# Altium PCB micro_USB.PcbDoc
Units mm, origin at the board's own origin, x right, y up, seen from the top; angles counter-clockwise.
Board outline 89 x 123.55 mm, 4 copper layers (Top Layer, Internal Plane 1, Internal Plane 2, Bottom Layer); 79 components, 73 nets, 290 pads, 14 vias.
Unrouted connection lines stored in the file: 2.
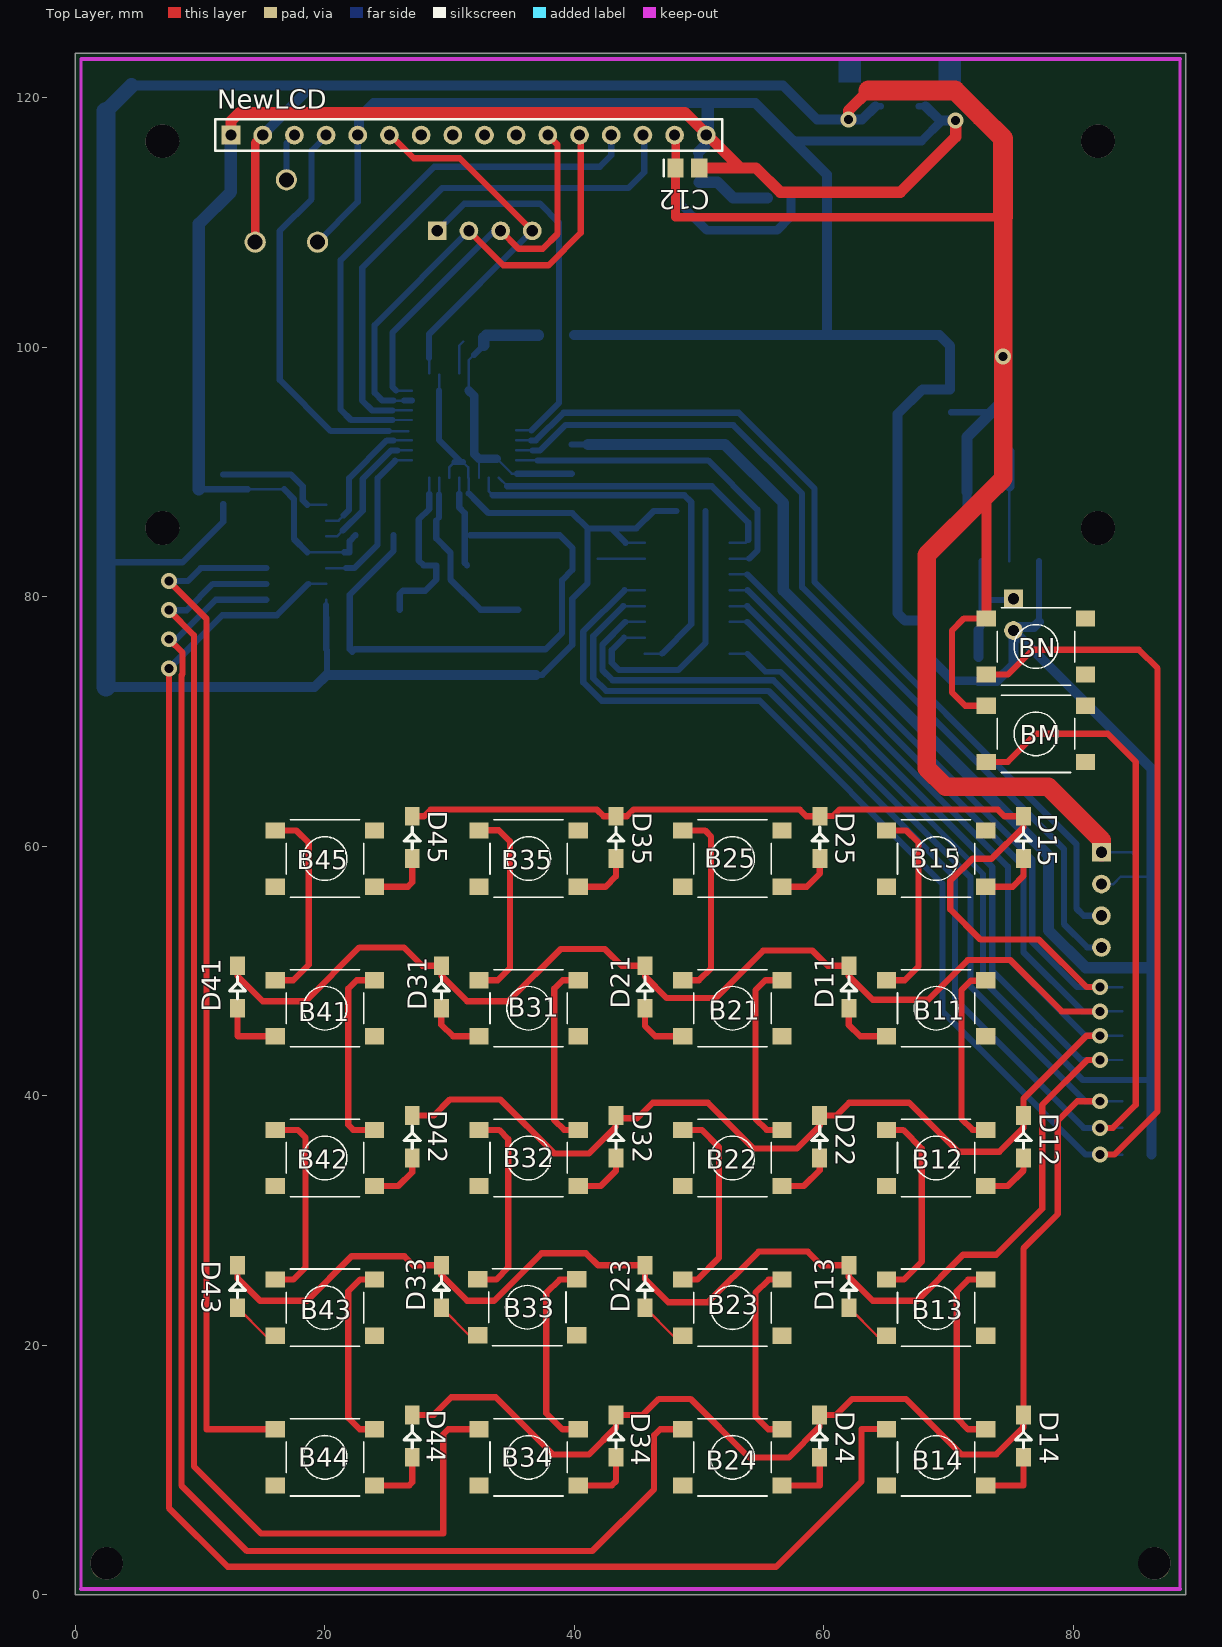
[diagram p0: Top Layer view]
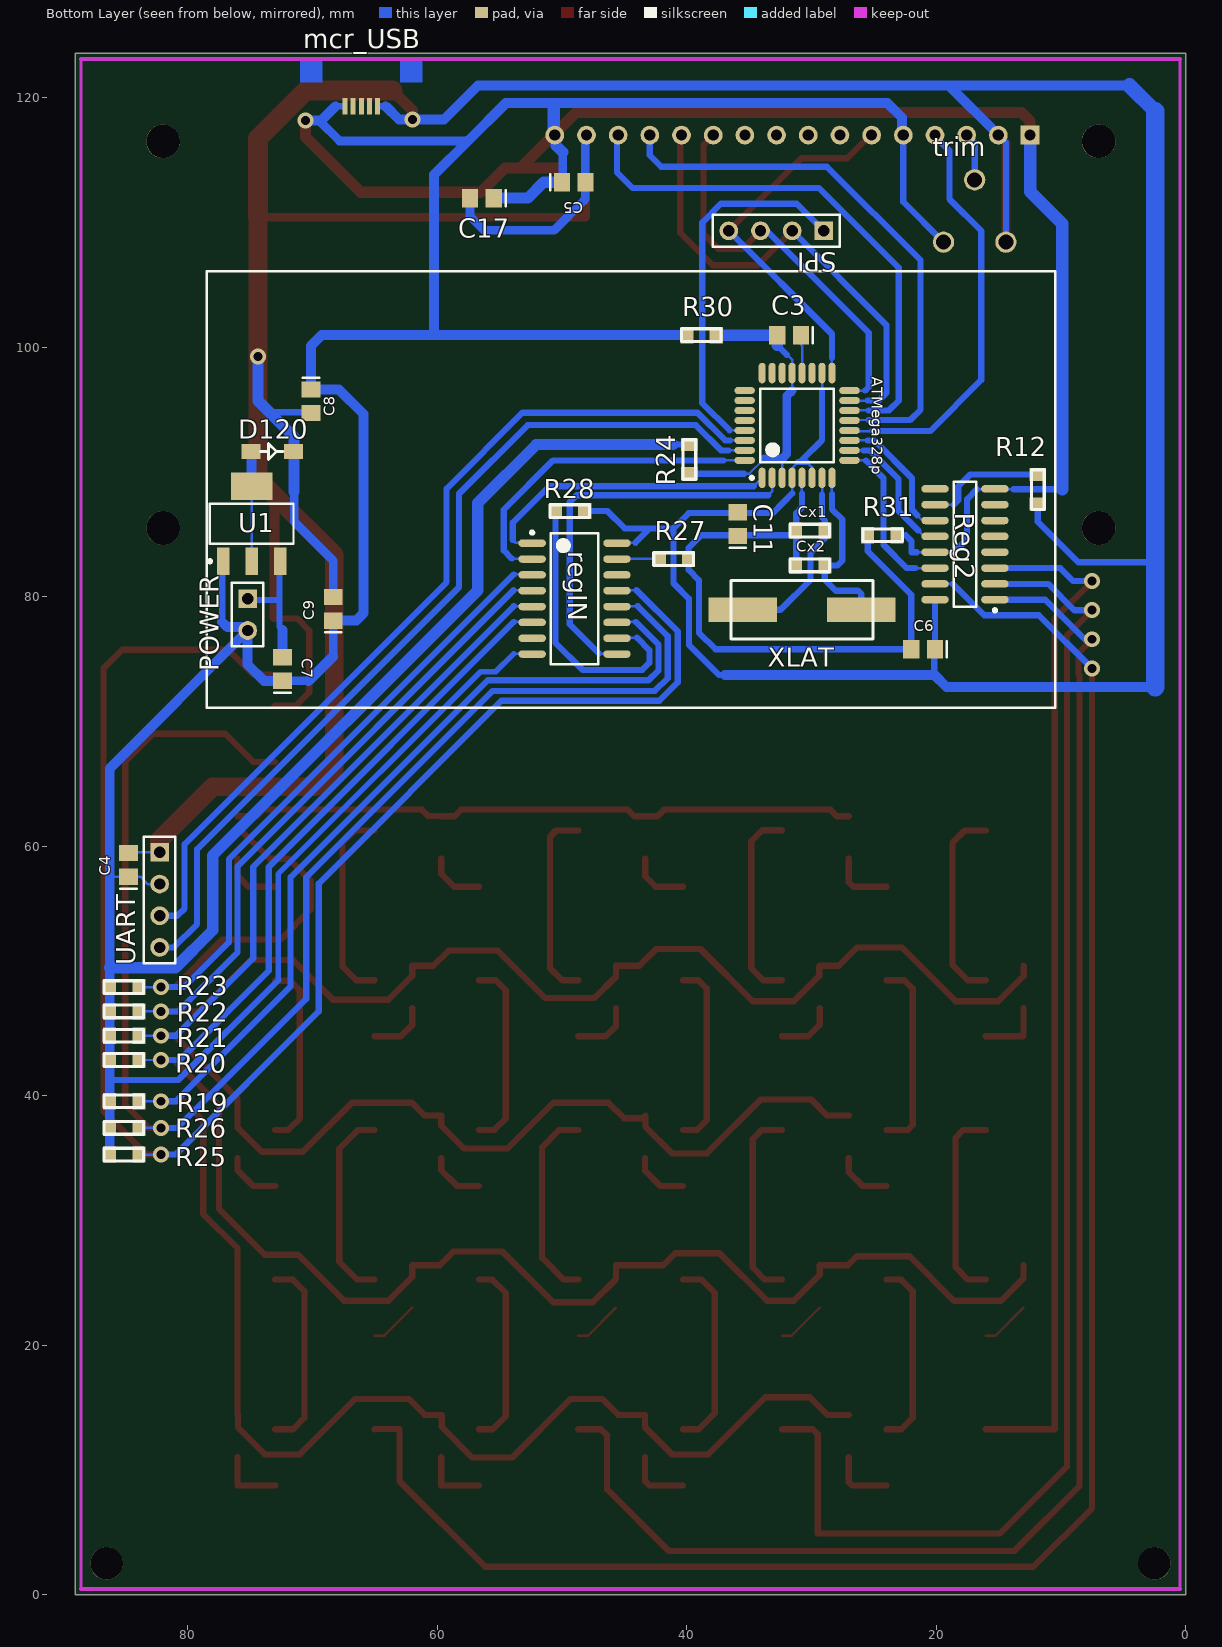
[diagram p1: Bottom Layer view, seen from below]
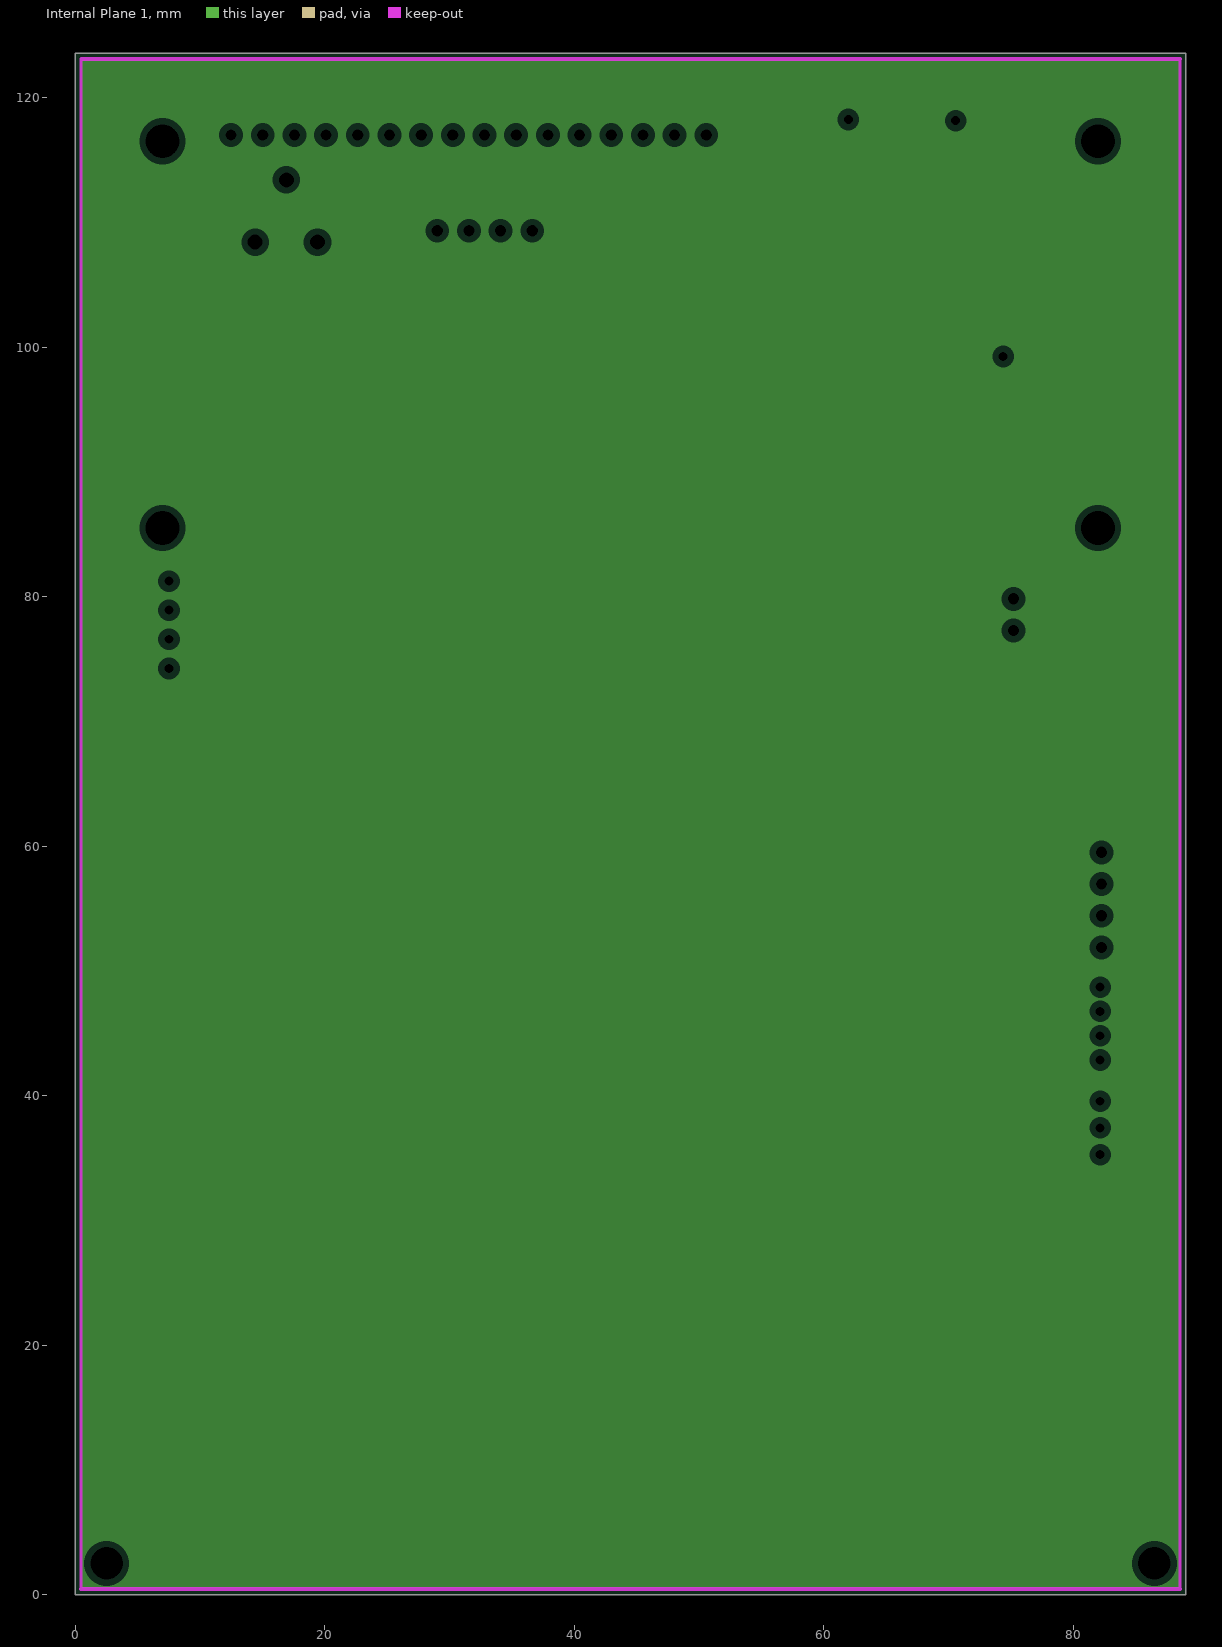
[diagram p2: Internal Plane 1, clearances drawn from the general rule]
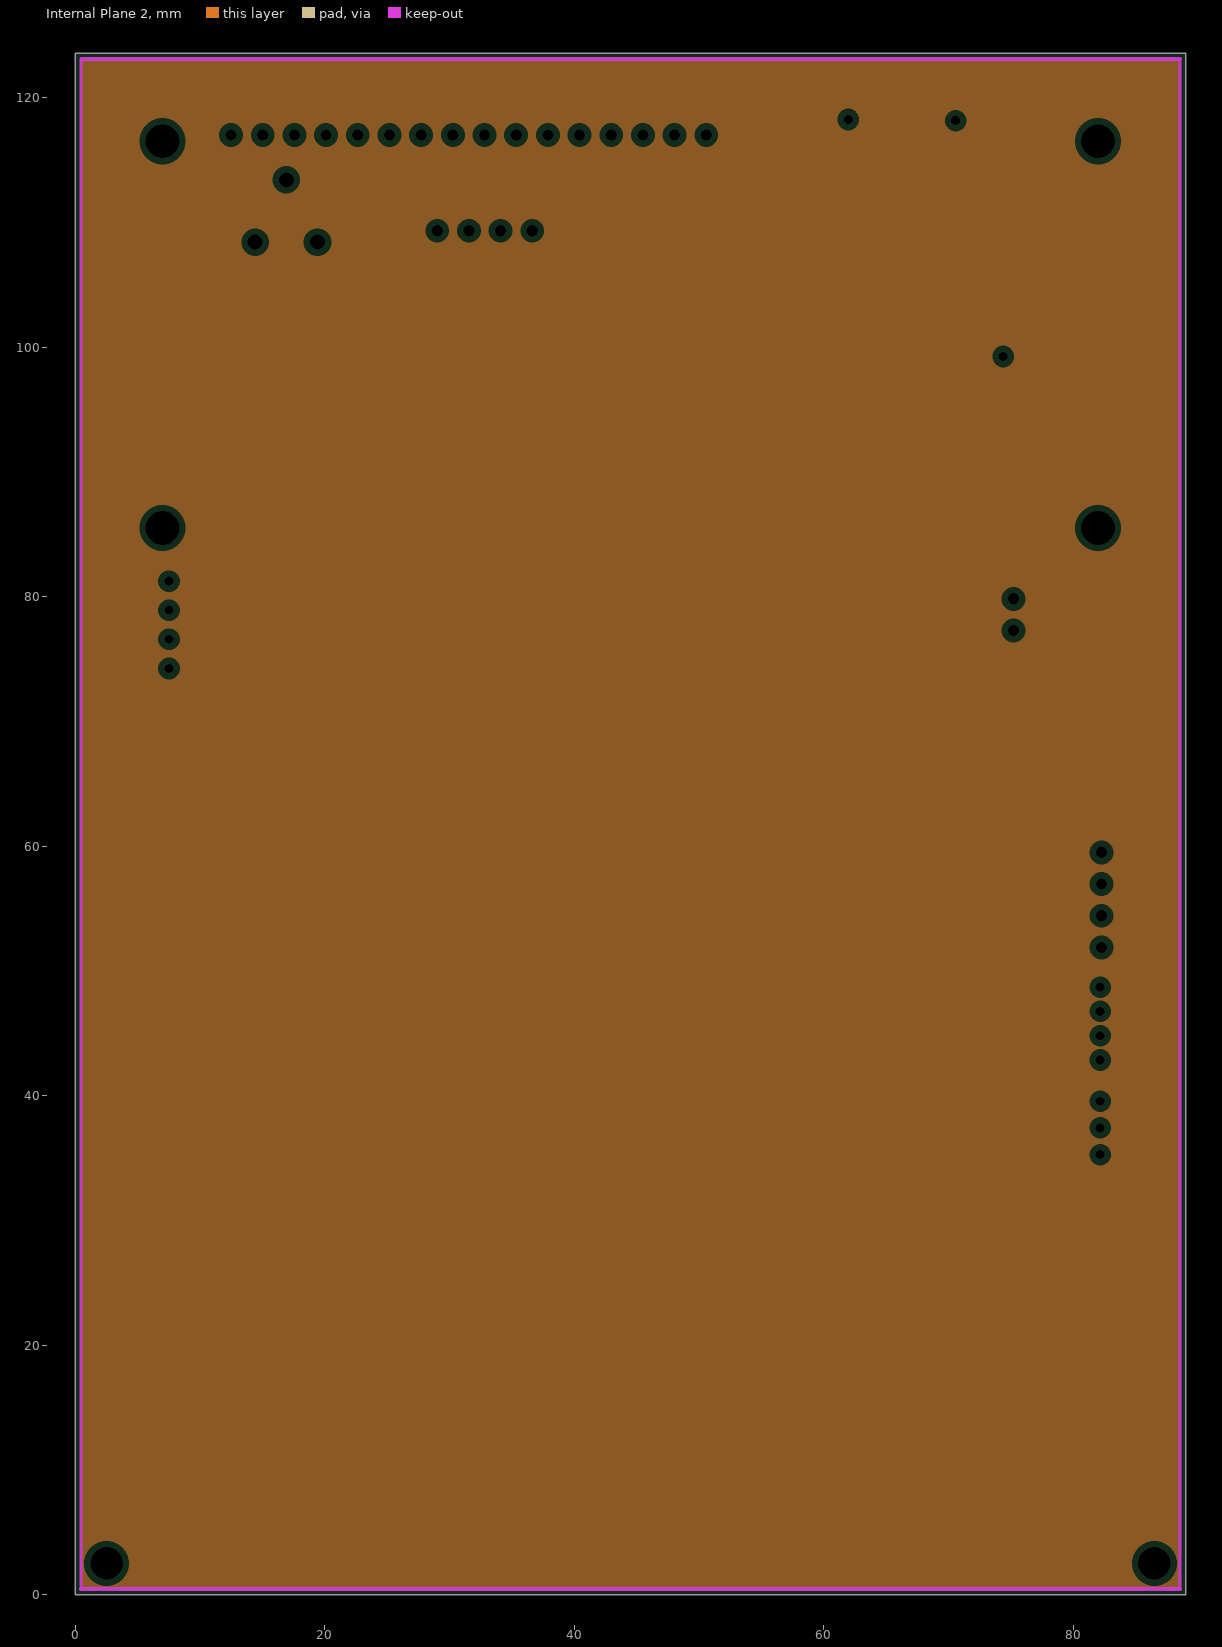
[diagram p3: Internal Plane 2, clearances drawn from the general rule]
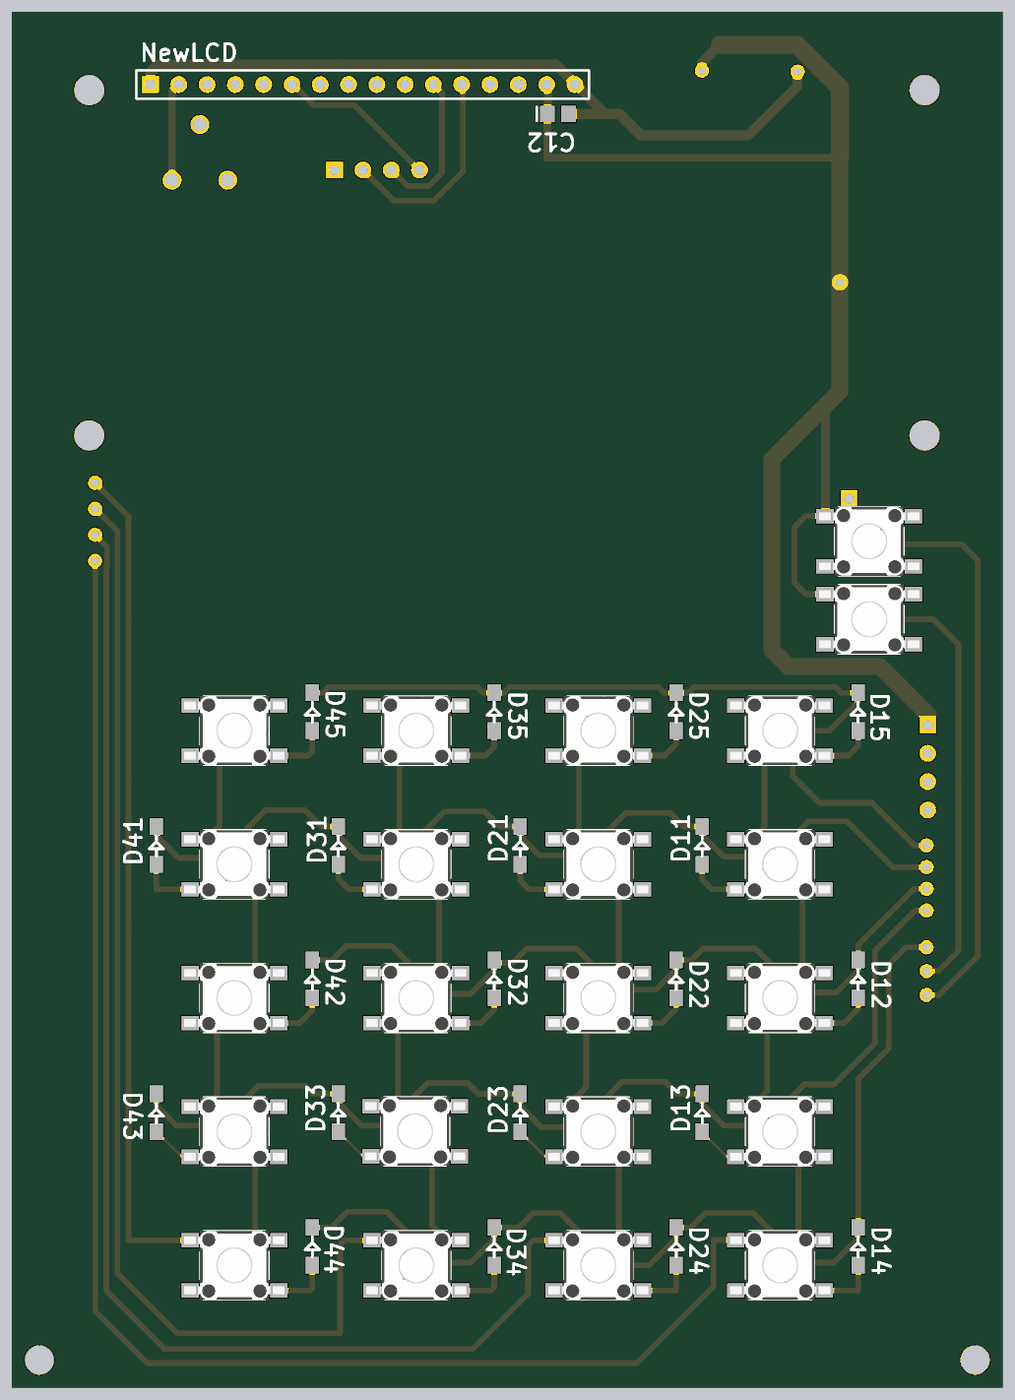
[diagram p4: 3D render of the assembled board from above, using the file's embedded part models]

## Layer stack, top to bottom
Top Solder: solder mask 0.0102, Solder Resist, Dk 3.5
Top Layer: signal copper 0.0356
Dielectric1: dielectric 0.32, FR-4, Dk 4.8
Internal Plane 1: plane copper 0.0356
Dielectric2: dielectric 0.32, FR-4, Dk 4.8
Internal Plane 2: plane copper 0.0356
Dielectric3: dielectric 0.32, FR-4, Dk 4.8
Bottom Layer: signal copper 0.0356
Bottom Solder: solder mask 0.0102, Solder Resist, Dk 3.5

## Board outline
-0.001,0.001 -0.001,123.546 23.27,123.546 46.962,123.546 88.999,123.546 88.999,0.001

## Design rules (kind name [scope] priority, off if disabled: settings)
Clearance [All] p1: gap=0.2
HoleSize [All] p1: absolutevalues=TRUE maxlimit=2.6 minlimit=0.025 maxpercent=80.000 minpercent=20.000
PlaneClearance [All] p1: clearance=0.508
PlaneConnect [All] p1: planeconnectstyle=Relief reliefexpansion=0.508 reliefentries=4 reliefconductorwidth=0.254 reliefairgap=0.254
PolygonConnect [All] p1: connectstyle=Relief reliefconductorwidth=0.254 reliefentries=4 polygonreliefangle="90 Angle" airgapwidth=0.254
RoutingVias [All] p1: holewidth=0.6 width=1 viastyle="Through Hole" minholewidth=0.711 minwidth=1.27 maxholewidth=0.711 maxwidth=1.27
SilkToSolderMaskClearance SilkscreenOverComponentPads [IsPad] p1: minsilkscreentomaskgap=0.254 clearancetoexposedcopper=TRUE
SolderMaskExpansion [All] p1: expansion=0.102
Width [All] p1: maxlimit=32 minlimit=0.2 preferedwidth=0.2 minimp=50.000000 maximp=50.000000 favimp=50.000000
26 further rules are at their usual default settings.

## Classes and differential pairs
component class NewPowerandPlaceSCH: ATMega328p B11 B12 B13 B14 B15 B21 B22 B23 B24 B25 B31 B32 B33 B34 B35 B41 B42 B43 B44 B45 BM BN C3 C11 C12 C17 D11 D12 D13 D14 D15 D21 D22 D23 D24 D25 D31 D32 D33 D34 D35 D41 D42 D43 D44 D45 D120 mcr_USB NewLCD POWER R12 R24 R27 R28 R30 R31 Reg2 regIN SPI trim U1 XLAT С5 С6 С7 С8 С9 Сx1 Сx2

## Components (designator, comment, footprint, x,y, rotation, side; value= is the part's Value field where it differs from the comment)
ATMega328p "ATmega328P-AU" 32A_N 31.15,93.723 r90 bottom
B11 "TS6604" 430182070816 68.999,47.001 r180 top
B12 "TS6604" 430182070816 68.999,35.001 r180 top
B13 "TS6604" 430182070816 68.999,23.001 r180 top
B14 "TS6604" 430182070816 68.999,11.001 r180 top
B15 "TS6604" 430182070816 68.999,59.001 r180 top
B21 "TS6604" 430182070816 52.669,47.001 r180 top
B22 "TS6604" 430182070816 52.669,35.001 r180 top
B23 "TS6604" 430182070816 52.669,23.001 r180 top
B24 "TS6604" 430182070816 52.669,11.001 r180 top
B25 "TS6604" 430182070816 52.669,59.001 r180 top
B31 "TS6604" 430182070816 36.329,47.001 r180 top
B32 "TS6604" 430182070816 36.329,35.001 r180 top
B33 "TS6604" 430182070816 36.222,23.034 r180 top
B34 "TS6604" 430182070816 36.329,11.001 r180 top
B35 "TS6604" 430182070816 36.329,59.001 r180 top
B41 "TS6604" 430182070816 19.999,47.001 r180 top
B42 "TS6604" 430182070816 19.999,35.001 r180 top
B43 "TS6604" 430182070816 19.999,23.001 r180 top
B44 "TS6604" 430182070816 19.999,11.001 r180 top
B45 "TS6604" 430182070816 19.999,59.001 r180 top
BM "TS6604" 430182070816 76.999,69.001 r180 top
BN "TS6604" 430182070816 76.999,76.001 r180 top
C3 "0.1 uF" 0805 31.785,100.962 r0 bottom
C11 "4.7 uF" 0805 35.906,85.809 r90 bottom
C12 "4.7 uF" 0805 49.051,114.362 r0 top
C17 "10 uF" 0805 56.417,111.949 r0 bottom
D11 "1N4148WS" sod323 61.999,47.001 r90 top
D12 "1N4148WS" sod323 75.999,35.001 r90 top
D13 "1N4148WS" sod323 61.999,23.001 r90 top
D14 "1N4148WS" sod323 75.999,11.001 r90 top
D15 "1N4148WS" sod323 75.999,59.001 r90 top
D21 "1N4148WS" sod323 45.666,47.001 r90 top
D22 "1N4148WS" sod323 59.666,35.001 r90 top
D23 "1N4148WS" sod323 45.666,23.001 r90 top
D24 "1N4148WS" sod323 59.666,11.001 r90 top
D25 "1N4148WS" sod323 59.669,59.001 r90 top
D31 "1N4148WS" sod323 29.332,47.001 r90 top
D32 "1N4148WS" sod323 43.332,35.001 r90 top
D33 "1N4148WS" sod323 29.332,23.001 r90 top
D34 "1N4148WS" sod323 43.332,11.001 r90 top
D35 "1N4148WS" sod323 43.329,59.001 r90 top
D41 "1N4148WS" sod323 12.999,47.001 r90 top
D42 "1N4148WS" sod323 26.999,35.001 r90 top
D43 "1N4148WS" sod323 12.999,23.001 r90 top
D44 "1N4148WS" sod323 26.999,11.001 r90 top
D45 "1N4148WS" sod323 26.999,59.001 r90 top
D120 "1N4148WS" sod323 74.918,91.632 r180 bottom
mcr_USB "microusb_connector" USB_connector_2 66.085,119.314 r0 bottom
NewLCD "Header 16" HDR1X16 12.472,117.001 r0 top
POWER "DS1021" HDR1X2 75.195,79.825 r270 bottom
R12 "100k" res_0805 11.846,89.786 r270 bottom
R19 "100k" res_0805 83.919,39.552 r0 bottom
R20 "100k" res_0805 83.919,42.854 r0 bottom
R21 "100k" res_0805 83.919,44.801 r0 bottom
R22 "100k" res_0805 83.919,46.749 r0 bottom
R23 "100k" res_0805 83.919,48.696 r0 bottom
R24 "0u" res_0805 39.786,92.199 r270 bottom
R25 "100k" res_0805 83.919,35.27 r0 bottom
R26 "100k" res_0805 83.919,37.411 r0 bottom
R27 "100k" res_0805 39.843,83.015 r0 bottom
R28 "100k" res_0805 48.168,86.865 r0 bottom
R30 "0u" res_0805 37.627,100.962 r0 bottom
R31 "0u" res_0805 25.492,84.92 r180 bottom
Reg2 "MC74HC595AD" 751B-05_N 17.688,84.198 r0 bottom
regIN "HD74HC165FP" PRSP0016DH-B_N 48.987,79.84 r180 bottom
SPI "DS1021" HDR1X4 29.002,109.329 r0 bottom
trim "trimmer" trimmer_place 16.908,110.918 r180 bottom
U1 "HT1117-50_SOT223" SOT223_N 74.869,85.836 r90 bottom
UART "DS1021" HDR1X4 82.25,59.5 r270 bottom
XLAT "M49-16.000-18- 30/50/-40+85" cristal 26,78.951 r0 bottom
С4 "10 uF" 0805 84.75,58.5 r90 bottom
С5 "4.7 uF" 0805 49.051,113.219 r180 bottom
С6 "4.7 uF" 0805 21.047,75.776 r0 bottom
С7 "10 uF" 0805 72.399,74.2 r90 bottom
С8 "4.7 uF" 0805 70.113,95.663 r270 bottom
С9 "4.7 uF" 0805 68.335,79.026 r90 bottom
Сx1 "22 pF" res_0805 28.921,85.301 r0 bottom
Сx2 "22 pF" res_0805 28.921,82.507 r0 bottom

## Footprints (in the part's own frame and the unit in brackets; to place one, negate y for a bottom-side part, rotate by r counter-clockwise, add the part's x,y. Pads: shape width x height; smd on the part's side, far side on the other; paste and mask are expansions set on the pad)
32A_N [mm] "Thin QFP, 32-Leads, Body 7x7mm, Pitch 0.8mm, IPC Medium Density"
  oval 1.65x0.55 smd: 1(-4.2,2.8) 2(-4.2,2) 3(-4.2,1.2) 4(-4.2,0.4) 5(-4.2,-0.4) 6(-4.2,-1.2) 7(-4.2,-2) 8(-4.2,-2.8) 17(4.2,-2.8) 18(4.2,-2) 19(4.2,-1.2) 20(4.2,-0.4) 21(4.2,0.4) 22(4.2,1.2) 23(4.2,2) 24(4.2,2.8)
  oval 0.55x1.65 smd: 9(-2.8,-4.2) 10(-2,-4.2) 11(-1.2,-4.2) 12(-0.4,-4.2) 13(0.4,-4.2) 14(1.2,-4.2) 15(2,-4.2) 16(2.8,-4.2) 25(2.8,4.2) 26(2,4.2) 27(1.2,4.2) 28(0.4,4.2) 29(-0.4,4.2) 30(-1.2,4.2) 31(-2,4.2) 32(-2.8,4.2)
  silkscreen extent -4.32,-2.95 2.95,3.75, body extent -3.5,-3.5 3.5,3.5, height 1.2
751B-05_N [mm] "SOIC, 16-Leads, Body 9.9x3.9mm, Pitch 1.27mm, IPC Medium Density"
  oval 2.2x0.6 smd: 1(-2.4,4.445) 2(-2.4,3.175) 3(-2.4,1.905) 4(-2.4,0.635) 5(-2.4,-0.635) 6(-2.4,-1.905) 7(-2.4,-3.175) 8(-2.4,-4.445) 9(2.4,-4.445) 10(2.4,-3.175) 11(2.4,-1.905) 12(2.4,-0.635) 13(2.4,0.635) 14(2.4,1.905) 15(2.4,3.175) 16(2.4,4.445)
  silkscreen extent -2.52,-5 0.9,5.42, body extent -2,-5 2,5, height 1.75
0805 [mm] "Chip Capacitor; Body 2.0 x 1.2 mm (LxW typ)"
  rect 1.3x1.5 smd: 1(-0.95,0) 2(0.95,0)
  silkscreen extent -1.9,-0.65 -1.9,0.65
430182070816 [mm] "6*6mm vertical type, SMD, height 7.0mm, black actuator, 160gf, T&R"
  rect 1.55x1.3 smd: 1(-3.975,2.25) 2(-3.975,-2.25) 3(3.975,2.25) 4(3.975,-2.25)
  silkscreen extent -3.1,-3.1 3.1,3.1, body extent -4.5,-3.1 4.5,3.1, height 7
cristal [mm]
  rect 5.5x2 smd: 0(0,0) 1(9.5,0)
  silkscreen extent -0.95,-2.35 10.45,2.35
HDR1X2 [mm] "Connector; Header; 2 Position"
  rect 1.5x1.5 hole 0.9: 1(0,0)
  round 1.5 hole 0.9: 2(2.54,0)
  silkscreen extent -1.27,-1.27 3.81,1.27
HDR1X4 [mm] "Connector; Header; 4 Position"
  rect 1.5x1.5 hole 0.9: 1(0,0)
  round 1.5 hole 0.9: 2(2.54,0) 3(5.08,0) 4(7.62,0)
  silkscreen extent -1.27,-1.27 8.89,1.27
HDR1X16 [mm] "Connector; Header; 16 Position"
  rect 1.5x1.5 hole 0.9: 1(0,0)
  round 1.5 hole 0.9: 2(2.54,0) 3(5.08,0) 4(7.62,0) 5(10.16,0) 6(12.7,0) 7(15.24,0) 8(17.78,0) 9(20.32,0) 10(22.86,0) 11(25.4,0) 12(27.94,0) 13(30.48,0) 14(33.02,0) 15(35.56,0) 16(38.1,0)
  silkscreen extent -1.27,-1.27 39.37,1.27
PRSP0016DH-B_N [mm] "SOP, 16-Leads, Body 10.06x5.5mm, Pitch 1.27mm, IPC Medium Density"
  oval 2.2x0.6 smd: 1(-3.4,4.445) 2(-3.4,3.175) 3(-3.4,1.905) 4(-3.4,0.635) 5(-3.4,-0.635) 6(-3.4,-1.905) 7(-3.4,-3.175) 8(-3.4,-4.445) 9(3.4,-4.445) 10(3.4,-3.175) 11(3.4,-1.905) 12(3.4,-0.635) 13(3.4,0.635) 14(3.4,1.905) 15(3.4,3.175) 16(3.4,4.445)
  silkscreen extent -3.52,-5.25 1.9,5.42, body extent -2.7,-5.25 2.7,5.25, height 2.2
res_0805 [mm]
  rect 1.05x1.3 smd: 0(0,0) 1(2.35,0)
  silkscreen extent -0.38,-0.51 2.79,0.51
sod323 [mm]
  rect 1.5x1.2 smd: 0(0,0) 1(3.4,0)
  silkscreen extent 0.76,-0.63 2.54,0.64
SOT223_N [mm] "SOT223, 4-Leads, Body 6.5x3.5mm, Pitch 2.3mm, Lead Span 7mm, IPC Medium Density"
  rect 2.2x1 smd: 1(-3,2.3) 2(-3,0) 3(-3,-2.3)
  rect 2.2x3.3 smd: 4(3,0)
  silkscreen extent -3.12,-3.35 1.6,3.48, body extent -1.85,-3.35 1.85,3.35, height 1.8
trimmer_place [mm]
  round 1.7 hole 1.2: 1(-2.5,-2.5) 2(2.5,-2.5) 3(0,2.5)
USB_connector_2 [mm]
  rect 0.4x1.35 smd: 1(-1.3,0) 2(-0.65,0) 3(0,0) 4(0.65,0) 5(1.3,0)
  Top Layer region: 3.1,-1.9 4.9,-1.9 4.9,-3.625 3.1,-3.625
  Top Layer region: -4.9,-1.9 -3.1,-1.9 -3.1,-3.625 -4.9,-3.625

## Part data
ATMega328p: "8-bit AVR Microcontroller, 32KB Flash, 1KB EEPROM, 2KB SRAM, 32-pin TQFP, Industrial Grade (-40°C to 85°C)"
B11 B12 B13 B14 B15 B21 B22 B23 B24 B25 B31 B32 B33 B34 B35 B41 B42 B43 B44 B45 BM BN: library part 430182070816, "WS-TASV SMD Tact Switch 6X6 mm"
C3 C11 C12 C17 С4 С5 С6 С7 С8 С9 Сx1 Сx2: library part C0805, "Ceramic Chip Capacitor - Standard"
D11 D12 D13 D14 D15 D21 D22 D23 D24 D25 D31 D32 D33 D34 D35 D41 D42 D43 D44 D45 D120: library part SOD323
NewLCD: "Header, 16-Pin"
POWER: library part "Header 2", "Header, 2-Pin"
R12 R19 R20 R21 R22 R23 R24 R25 R26 R27 R28 R30 R31: library part res_0805
Reg2: "8-Bit Serial-Input/Serial or Prallel-Output Shift Register with Latched 3-State Outputs"
regIN: "Parallel-Load 8-bit Shift Register"
SPI UART: library part "Header 4", "Header, 4-Pin"
U1: "5.0V, 1A General Purpose LDO"
XLAT: library part cristal_smd

## Free pads (board coordinates)
  round 2.6 hole 2.6: 11(2.499,2.501) 13(86.499,2.501)
  round 2.7 hole 2.7: 15(6.972,85.501) 16(81.972,85.501) 17(6.972,116.501) 18(81.972,116.501)

## Via types
v1: diameter 1.27, hole 0.711, Top Layer to Bottom Layer, 14 vias

## Nets (pads, with @x,y where several pads share a name; then routed paths per layer and width w, separated by ;. In a path a pad name is that pad's centre, name@x,y a point inside that pad or via, vN(x,y) a via of type N, cw(c..) or ccw(c..) an arc to the next point about the centre after c; other vN are vias at no path point)
GND: ATMega328p.3 ATMega328p.5 ATMega328p.21 C3.2 C11.1 C12.2 C17.1 mcr_USB.5 NewLCD.1 NewLCD.5 NewLCD.16 POWER.2 R19.1 R20.1 R21.1 R22.1 R23.1 R24.0 R24.1 R25.1 R26.1 R27.0 R30.0 R30.1 R31.0 R31.1 Reg2.8 Reg2.13 regIN.8 trim.1 U1.1 UART.2 С4.1 С5.1 С6.2 С7.1 С8.1 С9.1 Сx1.1 Сx2.1 | length 542.3
  Top Layer w0.9: NewLCD.1 12.472,118.127 13.152,118.807 48.866,118.807 53.311,114.362 ; C12.2 53.311,114.362 ; v1(70.563,118.163) 70.563,116.856 66.132,112.425 56.502,112.425 54.565,114.362 53.311,114.362
  Bottom Layer w0.2: 13.808,88.603 16.729,88.603 ; 18.577,83.563 Reg2.13 21.555,83.563 ; ATMega328p.5 30.758,89.515 30.758,88.253 ; 31.531,96.517 31.531,98.96 31.969,99.398 ; ATMega328p.3 32.35,91.056 ; 33.78,91.056 34.987,89.849 35.398,89.849 ; regIN.8@52.457,75.435 53.853,75.435 ; 69.452,118.163 v1(70.563,118.163) ; UART.2 83.21,56.96 83.8,57.55 86.45,57.55 ; R25.1 R26.1 R19.1 R19.1@86.5,39.783
  Bottom Layer w0.45: 53.853,75.435 55.312,73.976 56.524,73.976 72.75,57.75 72.75,49.25
  Bottom Layer w0.5: 9.884,88.603 13.808,88.603 ; NewLCD.1@12.451,116.88 12.572,117.001 NewLCD.1@12.475,117.098 ; 16.729,88.603 17.519,87.813 17.519,84.621 18.577,83.563 ; trim.1 22.632,111.642 NewLCD.5 NewLCD.5@22.732,117.001 ; 21.555,83.563 21.976,83.563 21.976,84.452 22.444,84.92 ; С6.2 21.997,80.155 25.492,83.65 R31.0 ; С6.2@22.194,75.579 22.391,75.776 37.684,75.776 39.014,77.106 39.014,81.329 39.843,82.158 R27.0 39.843,83.904 38.827,84.92 Сx1.1@31.652,84.92 ; 30.758,88.253 30.758,87.147 31.207,86.698 31.207,82.698 Сx2.1@31.398,82.507 ; 31.969,99.398 32.731,100.16 ; C3.2@32.731,100.765 C3.2@32.928,100.962 ; 35.398,89.849 R24.1 ; R24.0 41.113,92.199 ; 50.448,116.14 50.448,116.272 50.672,116.496 NewLCD.16@50.672,117.001 ; mcr_USB.5@67.584,119.314 68.145,119.314 ; С9.1@67.74,78.097 С9.1@68.335,77.502 ; 72.75,49.25 80.75,41.25 86.25,41.25 ; 77.239,77.97 U1.1@77.239,82.836
  Bottom Layer w0.7: 31.531,96.517 31.969,96.079 31.969,91.437 32.35,91.056 33.78,91.056 ; С5.1@49.94,113.854 49.94,115.632 ; 57.65,116.533 67.822,116.533 69.449,118.16 69.452,118.163 ; 68.335,75.216 С9.1@68.335,77.502 ; 70.301,73.25 С7.1
  Bottom Layer w0.8: NewLCD.5@22.732,117.001 22.732,118.402 23.892,119.562 54.511,119.562 57.54,116.533 ; R30.1 60,100.962 ; 57.65,116.533 57.54,116.533 ; С9.1@67.74,78.097 66.487,78.097 65.909,78.675 65.909,94.634 67.888,96.613 С8.1 70.113,100.113 69.264,100.962 60,100.962 ; 68.145,119.314 69.299,118.16 69.449,118.16 v1@69.97,118.16 ; 68.335,75.216 70.301,73.25 ; С7.1 73.879,73.25 75.195,74.566 POWER.2 86.25,66.23 86.25,50.5 ; POWER.2@75.388,77.556 76.825,77.556 77.239,77.97 ; R25.1@86.25,35.27 86.25,50.25 ; 57.54,116.533 60.25,113.823 60.25,101.212 60,100.962
  Bottom Layer w0.9: 32.731,100.16 C3.2@32.731,100.765 ; C3.2@32.928,100.962 R30.0@37.119,100.962 ; 41.113,92.199 52.051,92.199 56.75,87.5 56.75,80.5 78,59.25 78,53.25 81,50.25 86.25,50.25 ; 49.94,115.632 50.448,116.14 ; С5.1 51.464,113.219 52.734,111.949 C17.1
  Bottom Layer w1: 9.884,88.603 9.884,109.89 12.451,112.457 NewLCD.1@12.451,116.88 ; NewLCD.16@50.672,117.001 50.672,119.315
NetATMega328p_1: ATMega328p.1 regIN.1 | length 24.4
  Bottom Layer w0.2: ATMega328p.1 34.616,88.857 ; regIN.1@52.457,84.325 53.726,84.325 53.94,84.539
  Bottom Layer w0.5: 34.616,88.857 51.019,88.857 53.94,85.936 53.94,84.539
NetATMega328p_2: ATMega328p.2 regIN.9 | length 32.1
  Bottom Layer w0.2: ATMega328p.2 33.15,88.438 33.453,88.135 ; regIN.9@45.657,75.435 47.025,75.435
  Bottom Layer w0.5: 33.453,88.135 48.82,88.135 49.368,87.587 49.368,77.778 47.025,75.435
NetATMega328p_4: ATMega328p.4 ATMega328p.6 ATMega328p.18 BM.4 BN.4 C11.2 C12.1 C17.2 D120.1 mcr_USB.1 NewLCD.2 NewLCD.15 R12.1 R28.0 Reg2.16 regIN.16 trim.2 UART.1 С4.2 С5.2 С6.1 С8.2 С9.2 | length 419.5
  Top Layer w0.5: C12.1 C12.1@48.132,114.393 ; BM.4 71.334,71.251 70.26,72.325 70.26,77.278 71.233,78.251 BN.4
  Top Layer w0.7: trim.2 14.408,116.397 NewLCD.2 ; C12.1 48.101,110.425 74.369,110.425 ; C12.1@48.132,114.393 NewLCD.15@48.132,117.001
  Top Layer w0.8: BN.4@73.054,78.348 73.054,88.148
  Top Layer w0.9: v1(61.97,118.25) 61.97,118.962 63.593,120.585
  Top Layer w1.5: 74.369,110.425 v1(74.369,99.25) 74.369,89.463 73.054,88.148 68.25,83.344 68.25,66.25 69.75,64.75 78,64.75 82.268,60.482 UART.1@82.268,59.5
  Top Layer w1.6: 63.593,120.585 70.514,120.585 72.601,118.498 74.369,116.719 74.369,110.425
  Bottom Layer w0.2: 14.408,116.397 NewLCD.2 ; 20.088,79.332 Reg2.16 ; 29.15,96.517 ATMega328p.18@29.15,97.796 ; ATMega328p.6 29.95,90.364 30.384,90.798 ; 31.05,90.798 31.475,90.373 ATMega328p.4@31.475,89.523 ; 31.531,88.279 ATMega328p.4@31.531,89.504 ; 44.104,84.325 regIN.16@45.657,84.325 ; UART.1 84.7,59.5 С4.2@85,59.2
  Bottom Layer w0.5: 2.442,82.75 8.59,82.75 11.846,86.006 R12.1 ; trim.2 14.408,116.397 ; 20.088,79.332 20.088,78.343 20.097,78.334 С6.1 20.158,75.715 20.158,73.744 20.158,73.726 ; 29.15,96.517 29.15,92.548 30.769,90.929 ; 30.384,90.798 31.05,90.798 ; 31.531,88.279 32.265,87.545 33.112,86.698 39.843,86.698 41.056,85.485 41.056,81.067 39.818,79.829 39.818,76.132 37.412,73.726 36.912,73.726 ; 41.183,85.468 42.961,85.468 ; 44.104,84.325 42.961,85.468 ; 48.132,111.852 48.225,111.758 ; R28.0 46.36,86.865 44.963,85.468 42.961,85.468 ; 64.127,119.312 64.57,119.312 ; С8.2@70.187,94.786 73.416,94.786
  Bottom Layer w0.7: 48.132,111.852 NewLCD.15@48.132,117.001 ; 48.225,111.758 50.607,109.377 56.248,109.377 57.367,110.496 C17.2 ; С9.2 68.335,82.866 71.469,86 71.469,88.384
  Bottom Layer w0.8: 2.442,72.75 19.164,72.75 20.158,73.744 ; 4.5,120.966 56.729,120.966 59.445,118.25 v1(61.97,118.25) 63.065,118.25 64.127,119.312 ; NewLCD.2 18.945,120.934 ; 20.158,73.726 36.912,73.726
  Bottom Layer w0.9: 71.469,88.384 71.469,92.801 74.369,95.701 v1(74.369,99.25)
  Bottom Layer w1.2: 2.442,118.908 4.5,120.966
  Bottom Layer w1.5: 2.442,72.75 2.442,82.75 2.442,118.908
NetATMega328p_7: ATMega328p.7 XLAT.1 Сx1.0 | length 14.8
  Bottom Layer w0.2: 29.15,88.197 ATMega328p.7
  Bottom Layer w0.5: 28.921,86.113 Сx1.0 28.921,84.666 30.064,83.523 30.064,81.364 32.477,78.951 XLAT.1 ; 29.15,86.342 29.15,88.197
NetATMega328p_8: ATMega328p.8 XLAT.0 Сx2.0 | length 14.3
  Bottom Layer w0.2: ATMega328p.8 28.353,88.222
  Bottom Layer w0.5: XLAT.0 26,80.221 26.254,80.475 28.032,80.475 28.921,81.364 Сx2.0 27.905,82.507 27.524,82.888 27.524,86.19 28.353,87.019 28.353,88.222
NetATMega328p_9: ATMega328p.9 Reg2.14 | length 13.3
  Bottom Layer w0.2: Reg2.14 21.682,82.293 ; 25.873,90.923 ATMega328p.9
  Bottom Layer w0.5: 21.682,82.293 22.357,82.293 24.222,84.158 24.222,89.492 25.619,90.889
NetATMega328p_10: ATMega328p.10 Reg2.12 | length 11.2
  Bottom Layer w0.2: Reg2.12 20.96,84.833 21.428,85.301 ; 25.818,91.723 ATMega328p.10
  Bottom Layer w0.5: 21.428,85.301 23.022,86.895 23.022,89.435 25.31,91.723 25.818,91.723
NetATMega328p_11: ATMega328p.11 Reg2.11 | length 11
  Bottom Layer w0.2: Reg2.11 21.087,86.103 21.511,86.527 ; 25.492,92.523 ATMega328p.11
  Bottom Layer w0.5: 21.511,86.527 21.936,86.952 21.936,89.492 24.967,92.523 25.492,92.523
NetATMega328p_12: ATMega328p.12 NewLCD.4 | length 33.2
  Bottom Layer w0.2: 25.141,93.272 ATMega328p.12@26.696,93.272
  Bottom Layer w0.5: NewLCD.4@20.192,117.001 18.929,115.738 18.929,111.875 16.376,109.322 16.376,97.374 20.478,93.272 25.141,93.272
NetATMega328p_13: ATMega328p.13 NewLCD.13 | length 44.3
  Bottom Layer w0.2: 25.395,94.161 ATMega328p.13@26.95,94.161
  Bottom Layer w0.5: 25.395,94.161 22.089,94.161 21.25,95 21.25,106.962 28.759,114.471 42.048,114.471 42.955,115.379 NewLCD.13@42.955,116.521
NetATMega328p_14: ATMega328p.14 NewLCD.14 | length 43.7
  Bottom Layer w0.2: 25.395,94.923 ATMega328p.14
  Bottom Layer w0.5: 25.395,94.923 23.796,94.923 23,95.719 23,106.372 29.385,112.757 44.32,112.757 45.592,114.029 NewLCD.14@45.592,117.001
NetATMega328p_15: ATMega328p.15 NewLCD.12 SPI.2 | length 38.4
  Top Layer w0.5: SPI.2 34.296,106.575 37.925,106.575 40.512,109.162 NewLCD.12@40.512,117.001
  Bottom Layer w0.2: 25.492,95.715 ATMega328p.15@26.361,95.723
  Bottom Layer w0.5: 25.492,95.715 24.595,95.723 23.981,96.337 23.981,101.768 SPI.2 ; ATMega328p.15@26.361,95.723 ATMega328p.15
NetATMega328p_16: ATMega328p.16 NewLCD.11 SPI.3 | length 32
  Top Layer w0.5: SPI.3 35.518,107.893 37.462,107.893 38.642,109.073 38.642,116.231 NewLCD.11
  Bottom Layer w0.2: 25.7,96.523 ATMega328p.16
  Bottom Layer w0.5: 25.7,96.523 25.408,96.815 25.408,101.158 33.579,109.329 SPI.3
NetATMega328p_17: ATMega328p.17 NewLCD.6 SPI.4 | length 29.4
  Top Layer w0.5: NewLCD.6@25.272,117.001 27.123,115.15 30.801,115.15 SPI.4
  Bottom Layer w0.2: ATMega328p.17 28.35,99.124
  Bottom Layer w0.5: 28.35,99.124 28.35,101.057 SPI.4
NetATMega328p_20: ATMega328p.20 C3.1 | length 2.7
  Bottom Layer w0.2: ATMega328p.20 30.75,100.115 C3.1@31.089,100.454
NetATMega328p_29: ATMega328p.29 SPI.1 | length 30.1
  Bottom Layer w0.2: ATMega328p.29 36.562,93.323
  Bottom Layer w0.5: SPI.1 31.17,111.497 37.25,111.497 38.759,109.988 38.759,95.52 36.562,93.323
NetATMega328p_30: ATMega328p.30 UART.3 | length 71.9
  Bottom Layer w0.2: ATMega328p.30 36.541,92.523
  Bottom Layer w0.5: 36.541,92.523 36.905,92.523 39.132,94.75 53.164,94.75 59.25,88.664 59.25,81.164 80.25,60.164 80.25,55 80.83,54.42 UART.3
NetATMega328p_31: ATMega328p.31 UART.4 | length 73
  Bottom Layer w0.2: ATMega328p.31 36.668,91.723
  Bottom Layer w0.5: 36.668,91.723 37.248,91.723 39.275,93.75 52.75,93.75 58.25,88.25 58.25,80.75 79.25,59.75 79.25,53.75 81.12,51.88 UART.4
NetATMega328p_32: ATMega328p.32 regIN.2 | length 26.7
  Bottom Layer w0.2: ATMega328p.32 37.049,90.923 ; regIN.2@52.457,83.055 54.01,83.055
  Bottom Layer w0.5: 37.049,90.923 50.714,90.923 54.669,86.968 54.669,83.736 ; 54.01,83.055 54.68,83.725
NetB11_2: B11.2 B12.2 | length 14.9
  Top Layer w0.5: B12.2 71.933,37.251 71.022,38.162 71.022,48.449 71.784,49.211 72.934,49.211 B11.2
NetB11_3: B11.3 D11.0 | length 4.7
  Top Layer w0.5: D11.0 61.999,45.661 62.909,44.751 B11.3
NetB11_4: B11.4 B15.4 | length 15.9
  Top Layer w0.5: B11.4 66.49,49.251 67.593,50.354 67.593,60.26 66.602,61.251 B15.4
NetB12_1: B12.1 D12.0 | length 4.5
  Top Layer w0.5: B12.1 74.755,32.751 75.999,33.995 D12.0
NetB12_4: B12.4 B13.4 | length 15.9
  Top Layer w0.5: B13.4 66.407,25.251 67.847,26.691 67.847,35.749 66.345,37.251 B12.4
NetB13_2: B13.2 B14.2 | length 15.6
  Top Layer w0.5: B14.2 71.549,13.251 70.641,14.159 70.641,24.319 71.573,25.251 B13.2
NetB13_3: B13.3 D13.0 | length 4
  Top Layer w0.2: D13.0 64.249,20.751 B13.3
NetB14_1: B14.1 D14.0 | length 5.3
  Top Layer w0.5: B14.1 75.999,8.751 D14.0
NetB14_4: B14.4 Reg2.15 | length 149.2
  Top Layer w0.5: v1(7.5,74.241) 7.5,6.933 12.212,2.221 56.163,2.221 63.021,9.079 63.021,13.27 65.005,13.27 B14.4
  Bottom Layer w0.2: 18.674,81.023 Reg2.15
  Bottom Layer w0.5: v1(7.5,74.241) 11.759,78.5 16.151,78.5 18.674,81.023
NetB15_1: B15.1 D15.0 | length 4.8
  Top Layer w0.5: B15.1 75.133,56.751 75.999,57.617 D15.0
NetB21_2: B21.2 B22.2 | length 15.3
  Top Layer w0.5: B22.2 55.423,37.251 54.512,38.162 54.512,48.449 55.314,49.251 B21.2
NetB21_3: B21.3 D21.0 | length 4.8
  Top Layer w0.5: D21.0 45.666,45.572 46.486,44.751 B21.3
NetB21_4: B21.4 B25.4 | length 15.7
  Top Layer w0.5: B21.4 49.98,49.251 50.956,50.227 50.956,60.768 50.473,61.251 B25.4
NetB22_1: B22.1 D22.0 | length 4.5
  Top Layer w0.5: B22.1 58.392,32.751 59.666,34.024 D22.0
NetB22_4: B22.4 B23.4 | length 16
  Top Layer w0.5: B23.4 49.856,25.251 51.591,26.986 51.591,35.876 50.216,37.251 B22.4
NetB23_2: B23.2 B24.2 | length 15
  Top Layer w0.5: B24.2 55.547,13.251 54.512,14.286 54.512,24.192 55.571,25.251 B23.2
NetB23_3: B23.3 D23.0 | length 4
  Top Layer w0.2: D23.0 47.916,20.751 B23.3
NetB24_1: B24.1 D24.0 | length 5.3
  Top Layer w0.5: B24.1 59.666,8.751 D24.0
NetB24_4: B24.4 Reg2.1 | length 126.4
  Top Layer w0.5: v1(7.5,76.583) 8.585,75.498 8.585,73.792 8.5,73.707 8.5,8.736 13.745,3.491 41.431,3.491 46.384,8.444 46.384,12.762 46.873,13.251 B24.4
  Bottom Layer w0.5: v1(7.5,76.583) 8.083,76.583 11.253,79.753 Reg2.1
NetB25_1: B25.1 D25.0 | length 4.7
  Top Layer w0.5: B25.1 58.623,56.751 59.669,57.797 D25.0
NetB31_2: B31.2 B32.2 | length 15
  Top Layer w0.5: B32.2 39.167,37.251 38.383,38.035 38.383,48.576 39.058,49.251 B31.2
NetB31_3: B31.3 D31.0 | length 4.7
  Top Layer w0.5: D31.0 29.332,45.689 30.27,44.751 B31.3
NetB31_4: B31.4 B35.4 | length 15.9
  Top Layer w0.5: B31.4 33.851,49.251 34.827,50.227 34.827,60.387 33.938,61.276 32.379,61.276 B35.4
NetB32_1: B32.1 D32.0 | length 4.6
  Top Layer w0.5: B32.1 42.116,32.751 43.332,33.967 D32.0
NetB32_4: B32.4 B33.4 | length 15.7
  Top Layer w0.5: B33.4@32.354,25.251 33.727,25.251 34.7,26.224 34.7,36.511 33.96,37.251 B32.4
NetB33_2: B33.2 B34.2 | length 15.7
  Top Layer w0.5: B34.2 39.037,13.251 37.748,14.54 37.748,24.192 38.807,25.251 B33.2@40.304,25.251
NetB33_3: B33.3 D33.0 | length 4
  Top Layer w0.2: D33.0 31.582,20.751 B33.3@32.354,20.751
NetB34_1: B34.1 D34.0 | length 5.1
  Top Layer w0.5: B34.1 43.008,8.751 43.332,9.075 D34.0
NetB34_4: B34.4 Reg2.2 | length 111.3
  Top Layer w0.5: v1(7.5,78.917) 9.5,76.917 9.5,10.276 14.888,4.888 29.493,4.888 29.493,12.851 29.893,13.251 B34.4
  Bottom Layer w0.5: v1(7.5,78.917) 8.917,78.917 11.023,81.023 Reg2.2
NetB35_1: B35.1 D35.0 | length 4.8
  Top Layer w0.5: B35.1 42.494,56.751 43.329,57.586 D35.0
NetB41_2: B41.2 B42.2 | length 15.6
  Top Layer w0.5: B42.2 22.276,37.251 21.873,37.654 21.873,48.576 22.548,49.251 B41.2
NetB41_3: B41.3 D41.0 | length 5.3
  Top Layer w0.5: D41.0 12.999,44.782 13.03,44.751 B41.3
NetB41_4: B41.4 B45.4 | length 16
  Top Layer w0.5: B41.4 17.468,49.251 18.698,50.481 18.698,60.26 17.707,61.251 B45.4
NetB42_1: B42.1 D42.0 | length 4.6
  Top Layer w0.5: B42.1 25.887,32.751 26.999,33.863 D42.0
NetB42_4: B42.4 B43.4 | length 15.9
  Top Layer w0.5: B43.4 17.471,25.251 18.444,26.224 18.444,36.638 17.831,37.251 B42.4
NetB43_2: B43.2 B44.2 | length 15.1
  Top Layer w0.5: B44.2 22.781,13.251 21.873,14.159 21.873,24.319 22.805,25.251 B43.2
NetB43_3: B43.3 D43.0 | length 4
  Top Layer w0.2: D43.0 15.249,20.751 B43.3
NetB44_1: B44.1 D44.0 | length 5.1
  Top Layer w0.5: B44.1 26.752,8.751 26.999,8.998 D44.0
NetB44_4: B44.4 Reg2.3 | length 83
  Top Layer w0.5: v1(7.5,81.25) 10.5,78.25 10.5,13.251 B44.4
  Bottom Layer w0.5: v1(7.5,81.25) 9,81.25 10.043,82.293 Reg2.3
NetB45_1: B45.1 D45.0 | length 5.1
  Top Layer w0.5: B45.1 26.652,56.751 26.999,57.098 D45.0
NetBM_3: BM.3 R26.0 regIN.12 | length 116.5
  Top Layer w0.5: BM.3 74.751,66.751 77,69 82.75,69 85,66.75 85,39.25 83.161,37.411 v1(82.141,37.411)
  Bottom Layer w0.2: 43.921,79.245 regIN.12@45.657,79.245 ; v1(82.141,37.411) R26.0
  Bottom Layer w0.5: 43.921,79.245 41.518,76.842 41.518,73.463 42.541,72.44 55.56,72.44 70.5,57.5 70.5,47.75 80.839,37.411 v1(82.141,37.411)
NetBN_3: BN.3 R25.0 regIN.13 | length 131.7
  Top Layer w0.5: BN.3@73.308,73.751 74.75,73.751 76.749,75.75 85.25,75.75 86.75,74.25 86.75,38.75 83.27,35.27 v1(82.141,35.27)
  Bottom Layer w0.2: 44.02,80.515 regIN.13@45.657,80.515 ; v1(82.141,35.27) R25.0
  Bottom Layer w0.5: 44.02,80.515 40.713,77.208 40.713,73.12 42.186,71.647 54.853,71.647 69.5,57 69.5,46.75 80.98,35.27 v1(82.141,35.27)
NetD11_1: D11.1 D21.1 D31.1 D41.1 R22.0 regIN.4 | length 142.9
  Top Layer w0.2: D41.1 D41.1@13.025,50.401
  Top Layer w0.5: D41.1 12.983,50.385 12.983,49.592 15.015,47.56 18.444,47.56 22.762,51.878 26.318,51.878 27.795,50.401 D31.1 29.366,50.367 29.366,49.592 31.398,47.56 34.7,47.56 38.891,51.751 42.447,51.751 43.797,50.401 D21.1 45.666,49.548 47.4,47.814 51.337,47.814 55.147,51.624 59.084,51.624 60.307,50.401 D11.1 61.999,49.598 63.91,47.687 68.355,47.687 71.53,50.862 74.959,50.862 ; 68.349,47.693 71.524,50.868 74.953,50.868 74.959,50.862 ; v1(82.141,46.749) 79.072,46.749 74.959,50.862
  Bottom Layer w0.2: regIN.4@52.457,80.515 53.883,80.515 ; v1(82.141,46.749) R22.0
  Bottom Layer w0.5: 53.883,80.515 76,58.398 76,51.5 80.751,46.749 v1(82.141,46.749)
NetD12_1: D12.1 D22.1 D32.1 D42.1 R21.0 regIN.5 | length 120.3
  Top Layer w0.5: D42.1 28.731,38.401 30.016,39.686 34.065,39.686 38.383,35.368 41.177,35.368 43.303,37.494 43.303,38.401 43.525,38.18 45.02,38.18 46.272,39.432 50.702,39.432 54.385,35.749 57.814,35.749 59.666,37.601 D22.1 60.989,38.401 62.02,39.432 66.831,39.432 70.768,35.495 74.07,35.495 75.999,37.424 D12.1 75.999,39.749 81.051,44.801 v1(82.141,44.801)
  Bottom Layer w0.2: regIN.5@52.457,79.245 53.853,79.245 ; v1(82.141,44.801) R21.0
  Bottom Layer w0.5: 53.853,79.245 74.75,58.348 74.75,51 80.949,44.801 v1(82.141,44.801)
NetD13_1: D13.1 D23.1 D33.1 D43.1 R20.0 regIN.6 | length 145.8
  Top Layer w0.2: D43.1 D43.1@13.025,26.401
  Top Layer w0.5: D43.1 12.999,25.351 14.793,23.557 18.571,23.557 22.127,27.113 26.368,27.113 27.08,26.401 D33.1 29.332,25.623 31.398,23.557 33.557,23.557 37.367,27.367 40.923,27.367 41.889,26.401 D23.1 45.666,25.291 47.527,23.43 50.702,23.43 54.766,27.494 58.703,27.494 59.796,26.401 D13.1 61.999,25.468 63.91,23.557 67.466,23.557 71.149,27.24 73.816,27.24 77.5,30.924 77.5,39.25 81.104,42.854 v1(82.141,42.854)
  Bottom Layer w0.2: regIN.6@52.457,77.975 53.853,77.975 ; v1(82.141,42.854) R20.0
  Bottom Layer w0.5: 53.853,77.975 73.5,58.328 73.5,50 80.646,42.854 v1(82.141,42.854)
NetD14_1: D14.1 D24.1 D34.1 D44.1 R19.0 regIN.11 | length 158.2
  Top Layer w0.2: D24.1@59.643,14.401 D24.1 ; D14.1@75.973,14.401 D14.1
  Top Layer w0.5: D44.1 28.719,14.401 30.128,15.81 33.684,15.81 38.256,11.238 41.177,11.238 43.332,13.393 D34.1 45.495,14.401 46.777,15.683 49.305,15.683 54.004,10.984 57.179,10.984 59.643,13.448 D24.1@59.643,14.401 ; D24.1 60.989,14.401 62.271,15.683 66.577,15.683 71.022,11.238 73.816,11.238 75.975,13.397 75.973,13.399 D14.1@75.973,14.401 ; D14.1 75.999,27.749 78.75,30.5 78.75,38 80.302,39.552 v1(82.141,39.552)
  Bottom Layer w0.2: 44.074,77.975 regIN.11@45.657,77.975 ; v1(82.141,39.552) R19.0
  Bottom Layer w0.5: 44.074,77.975 42.253,76.154 42.253,74.107 43.059,73.301 55.949,73.301 71.75,57.5 71.75,48.75 80.948,39.552 v1(82.141,39.552)
NetD15_1: D15.1 D25.1 D35.1 D45.1 R23.0 regIN.3 | length 123.9
  Top Layer w0.5: D45.1 27.951,62.401 28.477,62.927 41.812,62.927 42.338,62.401 D35.1 44.207,62.401 44.733,62.927 58.068,62.927 58.594,62.401 D25.1 59.687,62.419 60.735,62.419 61.243,62.927 73.943,62.927 74.469,62.401 D15.1 D15.1@75.975,62.377 ; 75.975,61.53 73.435,58.99 71.911,58.99 70.138,57.217 70.138,54.921 72.546,52.513 77.237,52.513 81.054,48.696 v1(82.141,48.696)
  Bottom Layer w0.2: regIN.3@52.457,81.785 53.853,81.785 ; v1(82.141,48.696) R23.0
  Bottom Layer w0.5: 53.853,81.785 76.7,58.938 76.7,52.3 80.304,48.696 v1(82.141,48.696)
NetD120_0: D120.0 U1.2 U1.4 | length 8.8
  Bottom Layer w0.2: U1.2 U1.4
  Bottom Layer w0.8: U1.4 D120.0@74.869,91.632
NetNewLCD_3: NewLCD.3 trim.3 | length 4.1
  Bottom Layer w0.2: 16.908,116.357 NewLCD.3
  Bottom Layer w0.5: trim.3 16.908,116.357
  Bottom Layer w0.9: NewLCD.3@17.652,117.001 NewLCD.3@17.652,117.253
NetPOWER_1: POWER.1 U1.3 С7.2 | length 10.5
  Bottom Layer w0.2: POWER.1@74.494,79.731 POWER.1@74.892,80.129
  Bottom Layer w0.5: 72.399,77.335 72.639,77.575 72.639,79.731 POWER.1@74.494,79.731 ; 72.639,79.845 U1.3@72.639,82.836 ; POWER.1@74.892,80.129 POWER.1
  Bottom Layer w0.8: С7.2 72.399,77.335
NetR12_0: R12.0 Reg2.10 | length 9.9
  Bottom Layer w0.2: 18.585,87.373 Reg2.10
  Bottom Layer w0.5: R12.0 17.285,89.786 18.221,88.85 18.221,87.737 18.585,87.373
NetR27_1: R27.1 regIN.15 | length 3.8
  Bottom Layer w0.2: R27.1@41.875,83.055 regIN.15@45.657,83.055
NetR28_1: R28.1 regIN.10 | length 23.3
  Bottom Layer w0.2: 43.978,76.705 regIN.10@45.657,76.705
  Bottom Layer w0.5: 43.978,76.705 42.988,75.715 42.988,74.704 43.567,74.125 48.352,74.125 50.518,76.291 R28.1
pads on no net: ATMega328p.19 ATMega328p.22 ATMega328p.23 ATMega328p.24 ATMega328p.25 ATMega328p.26 ATMega328p.27 ATMega328p.28 B11.1 B12.3 B13.1 B14.3 B15.2 B15.3 B21.1 B22.3 B23.1 B24.3 B25.2 B25.3 B31.1 B32.3 B33.1 B34.3 B35.2 B35.3 B41.1 B42.3 B43.1 B44.3 B45.2 B45.3 BM.1 BM.2 BN.1 BN.2 mcr_USB.2 mcr_USB.3 mcr_USB.4 NewLCD.7 NewLCD.8 NewLCD.9 NewLCD.10 Reg2.4 Reg2.5 Reg2.6 Reg2.7 Reg2.9 regIN.7 regIN.14

## Polygon pours and split planes (outlines as drawn)
no net on Internal Plane 1 (split plane): 88.489,0.511 0.509,0.511 0.509,123.036 88.489,123.036
no net on Internal Plane 2 (split plane): 88.489,0.511 0.509,0.511 0.509,123.036 88.489,123.036

## Keep-outs
Keep-Out Layer:
  lines w0.254: 0.456,0.456 0.456,123.094 ; 88.55,0.452 88.55,123.09
  lines w0.3: 0.45,0.45 88.55,0.452 ; 0.456,123.094 88.545,123.095

## Silkscreen, mask and mechanical layers (free items; w line width, h text height)
Bottom Overlay:
  lines w0.2: 10.456,71.095 78.456,71.095 78.456,106.095 10.456,106.095 10.456,71.095
Mechanical 1:
  lines w0.1: -0.001,0.001 -0.001,123.546 88.999,123.546 88.999,0.001 -0.001,0.001
Drill Drawing:
  text ".LEGEND" at 94.079,5.081 h1.52
  text "Drill Drawing." at 94.079,2.541 h1.52